# Altium PCB PCB.PcbDoc
Units mm, origin at the board's own origin, x right, y up, seen from the top; angles counter-clockwise.
Board outline 39.7 x 37.08 mm, 2 copper layers (Top Layer, Bottom Layer); 5 components, 4 nets, 14 pads, 112 vias.
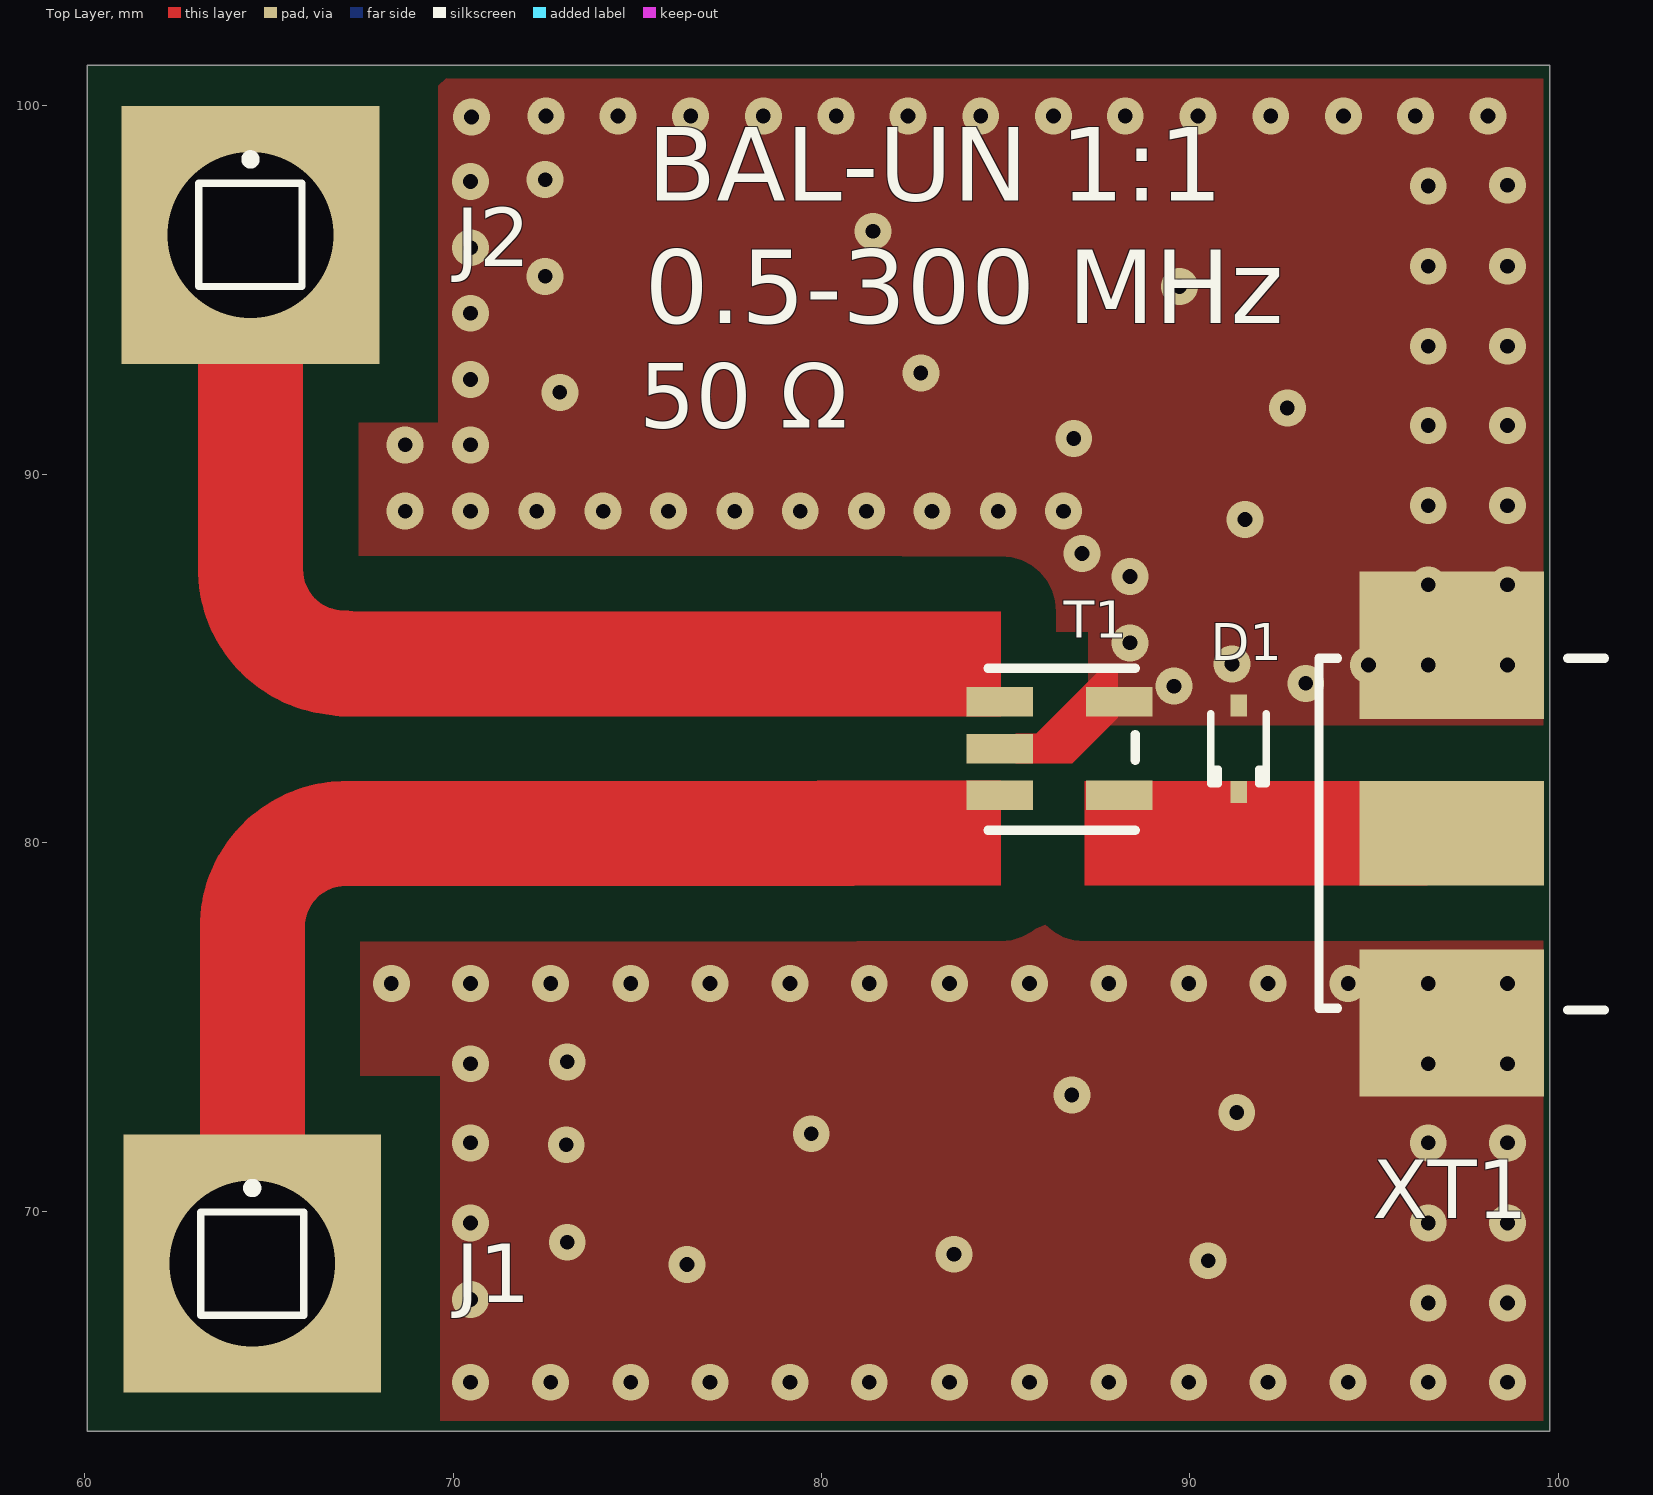
[diagram p0: Top Layer view]
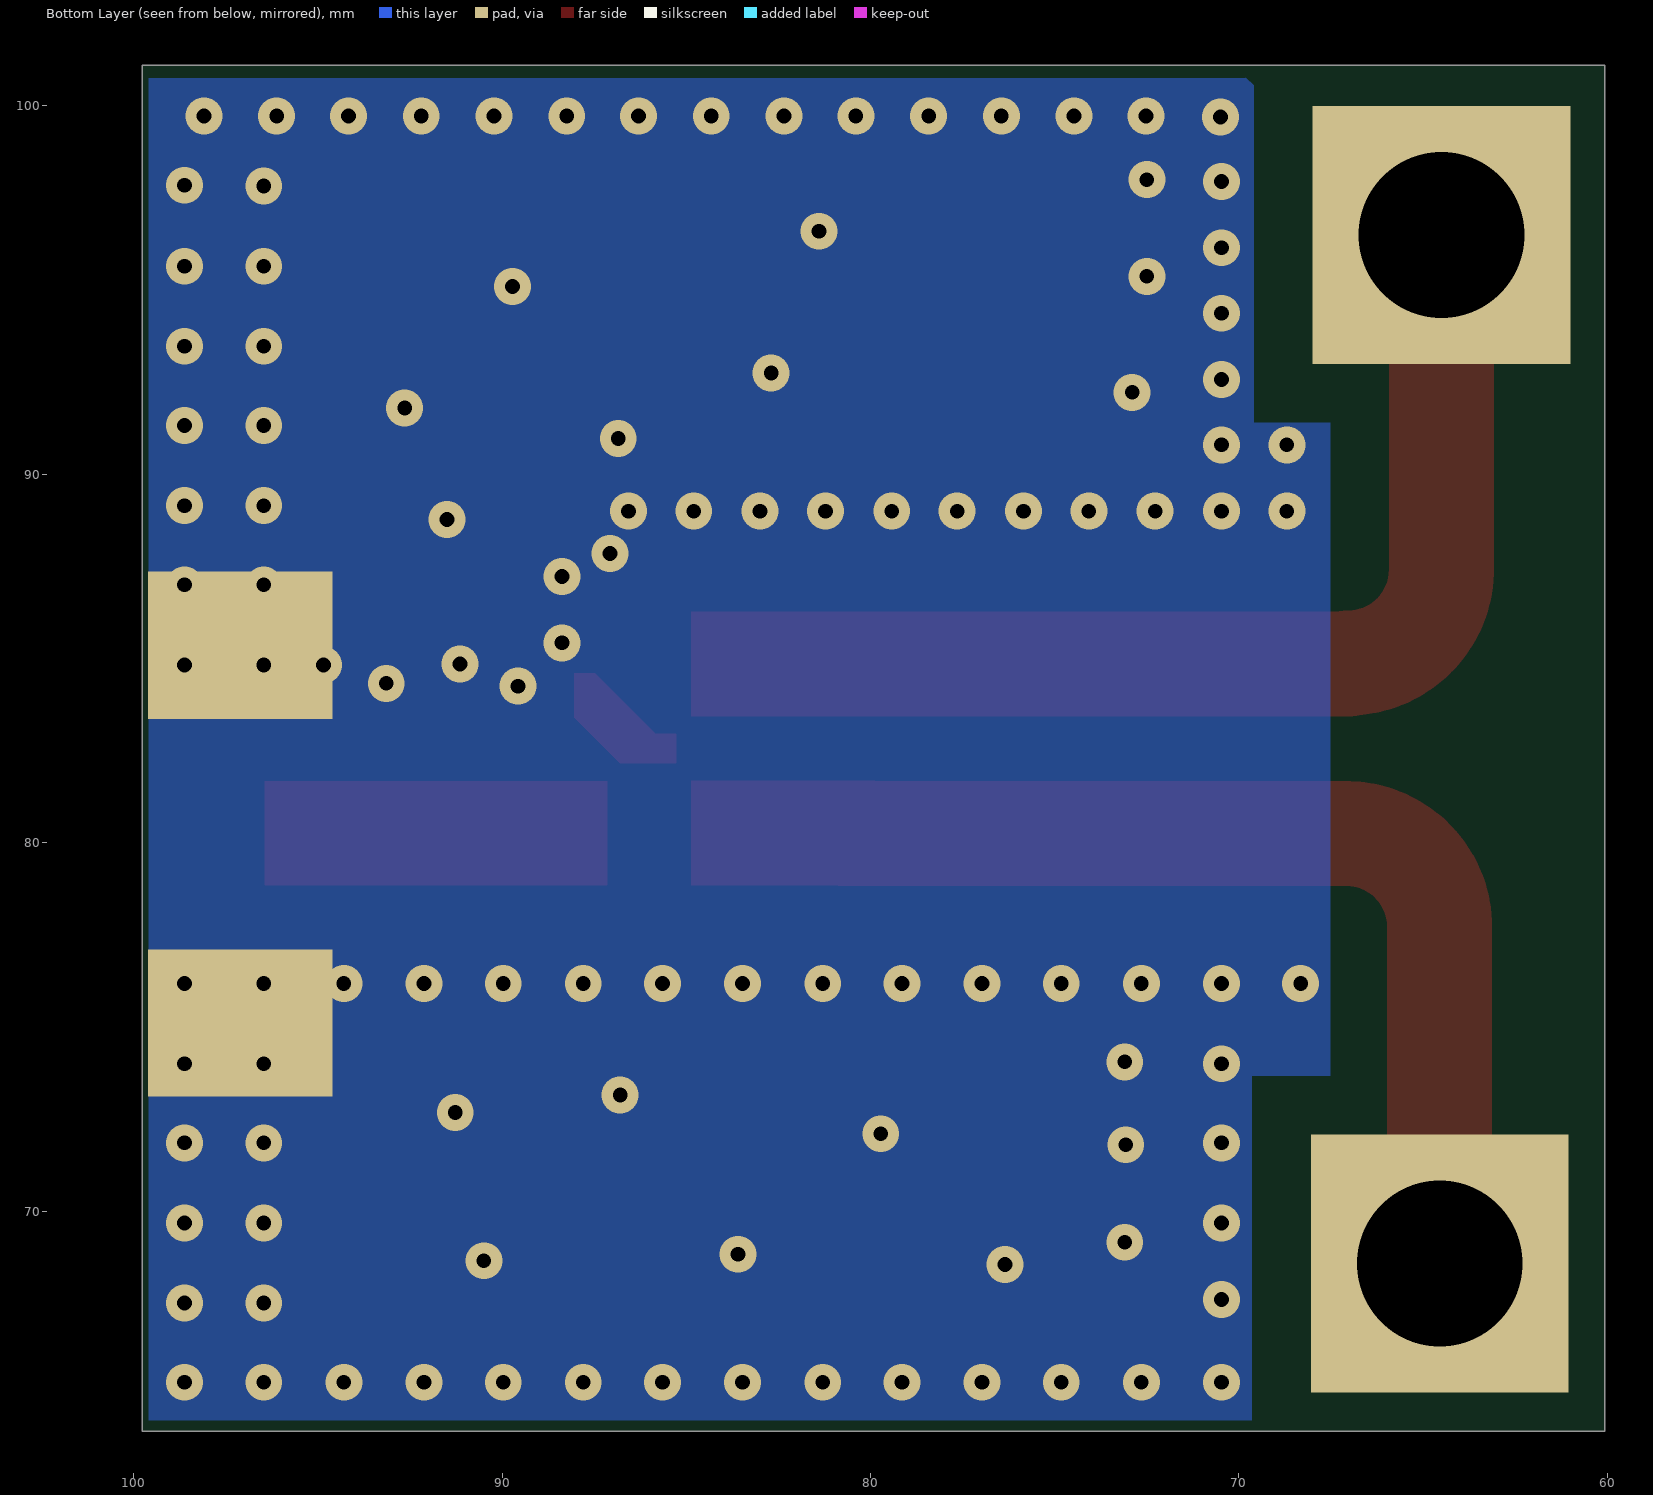
[diagram p1: Bottom Layer view, seen from below]
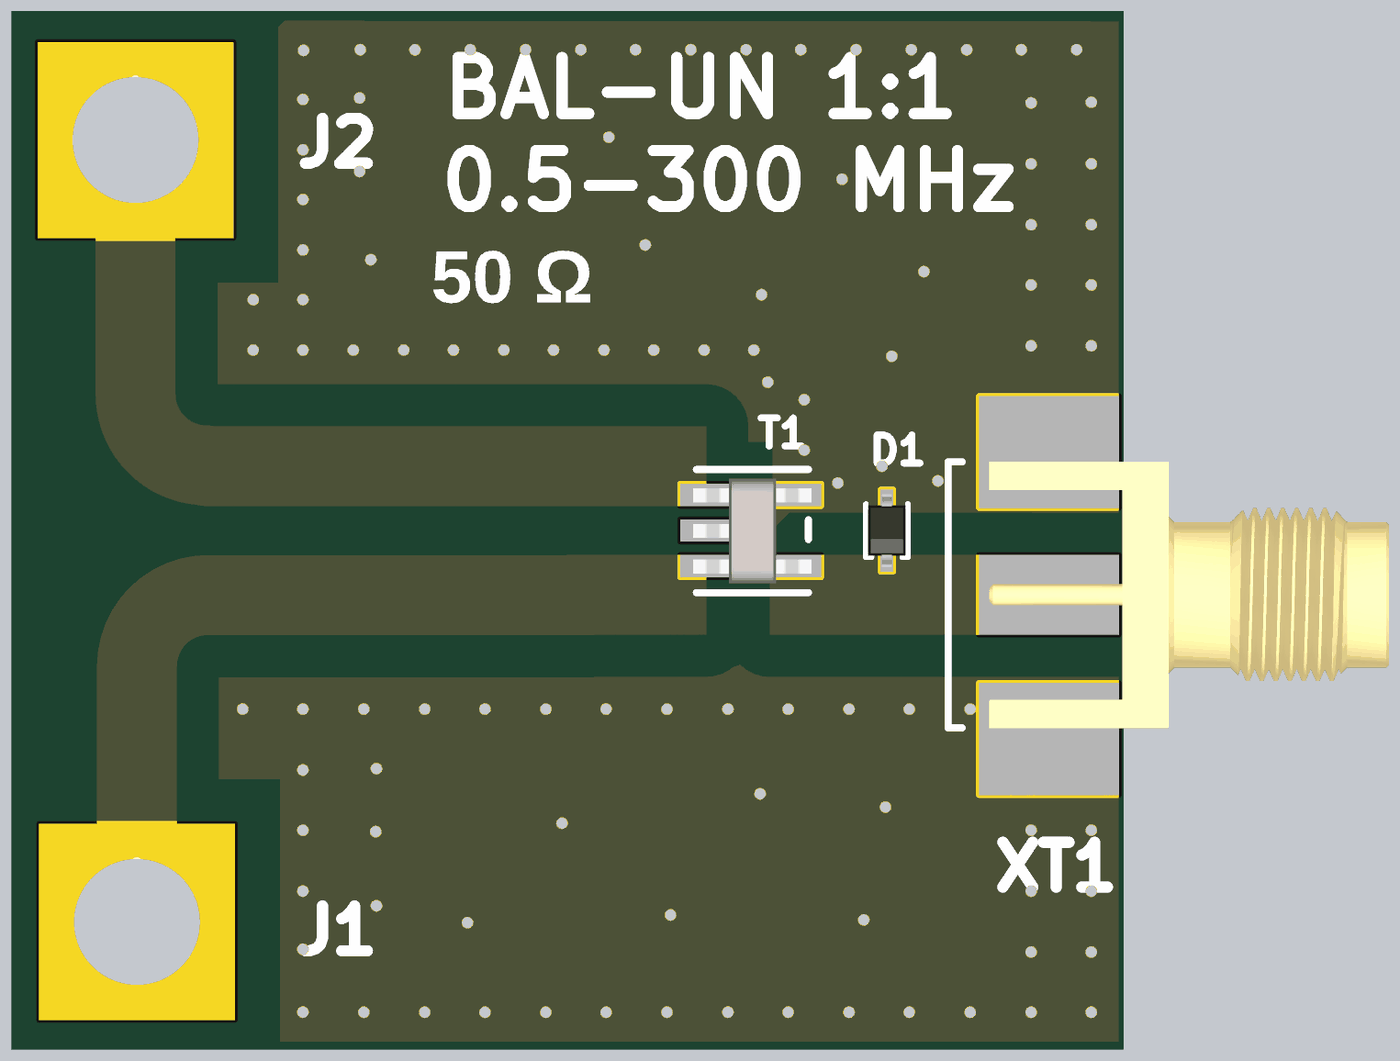
[diagram p2: 3D render of the assembled board from above, using the file's embedded part models]

## Layer stack, top to bottom
Top Solder: solder mask 0.0102, Solder Resist, Dk 3.5
Top Layer: signal copper 0.0356
Dielectric 1: dielectric 0.32, FR-4, Dk 4.8
Bottom Layer: signal copper 0.0356
Bottom Solder: solder mask 0.0102, Solder Resist, Dk 3.5

## Board outline
60.075,101.1 60.075,64.025 99.775,64.025 99.775,101.1

## Design rules (kind name [scope] priority, off if disabled: settings)
Clearance [All] p1: gap=0.4 ignorepadtopadclearanceinfootprint=TRUE except(1.5: Arc-Fill Arc-Poly Arc-Region Track-Fill Track-Poly Track-Region SMDPad-Fill SMDPad-Poly SMDPad-Region Fill-Fill Fill-Poly Fill-Region Poly-Poly Poly-Region Region-Region; 1.6: THPad-Fill THPad-Poly THPad-Region)
PlaneConnect [All] p1: planeconnectstyle=Direct reliefexpansion=0.508 reliefentries=4 reliefconductorwidth=0.254 reliefairgap=0.254
PolygonConnect [All] p1: connectstyle=Direct reliefconductorwidth=0.254 reliefentries=4 polygonreliefangle="90 Angle" airgapwidth=0.254
RoomDefinition balun [InComponentClass('balun')] p1 off: confinementstyle=ConfineIn formatcopy=TRUE lockcomponents=FALSE outline 55.295,41.379 133.4,41.379 133.4,60.175 55.295,60.175
RoutingVias [All] p1: holewidth=0.4 width=1 viastyle="Through Hole" minholewidth=0.4 minwidth=1 maxholewidth=0.4 maxwidth=1
SolderMaskExpansion [All] p1: expansion=0.102
Width [All] p1: maxlimit=3 minlimit=0.4 preferedwidth=0.8 impedancedriven=TRUE minimp=50.000000 maximp=50.000000 favimp=50.000000
29 further rules are at their usual default settings.

## Components (designator, comment, footprint, x,y, rotation, side; value= is the part's Value field where it differs from the comment)
D1 "NC" SOD-323 91.325,82.55 r270 top
J1 "A" PIN1 64.55,68.575 r0 top
J2 "B" PIN1 64.5,96.5 r0 top
T1 "TC4-1T" AT224 86.625,82.635 r90 top
XT1 "COAX-F" SMA-16 97.011,80.256 r180 top locked

## Footprints (in the part's own frame and the unit in brackets; to place one, negate y for a bottom-side part, rotate by r counter-clockwise, add the part's x,y. Pads: shape width x height; smd on the part's side, far side on the other; paste and mask are expansions set on the pad)
AT224 [mm] "Case style: AT224"
  rect 0.8x1.8 smd: 1(-1.35,1.78) 2(-0.08,1.78) 3(1.19,1.78) 4(1.19,-1.46) 6(-1.35,-1.46)
  silkscreen extent -2.3,-1.9 2.1,2.1, body extent -1.97,-2.01 1.77,2.22, height 3.55
PIN1 [mm] "Connector; Plug"
  rect 7x7 hole 4.5: 1(0,0)
  silkscreen extent -1.4,-1.4 1.4,2.17
SMA-16 [mm] "Edge female socket SMA"
  rect 5x2.85 smd: 1(-0.1,0)
  rect 5x4 smd: 2(-0.1,5.15) 2(-0.1,-5.1)
  rect 5x4 smd far side: 2(-0.1,5.15) 2(-0.1,-5.1)
  silkscreen extent -4.25,-4.75 3.5,4.8, body extent -12.25,-4.76 2.03,4.76, height 4.32
SOD-323 [mm]
  rect 0.59x0.45 smd: 1(-1.175,0) 2(1.175,0)
  silkscreen extent -0.95,-0.75 0.95,0.75, body extent -1.3,-0.68 1.3,0.67, height 1.1

## Part data
D1: library part TVS_BIDIR, "TVS Diodes"
J1 J2: library part Socket, "Socket", LatestRevisionDate=17-Jul-2002, LatestRevisionNote="Re-released for DXP Platform.", Publisher="Altium Limited"
T1: "RF TRANSFORMERS WIDEBAND"
XT1: "RF Coaxial PCB Connector, MCX; Thru-Hole, Right-Angle Mount Socket, Blunt Post Terminal, 50 Ohm Impedance", PackageDocument=04-Jul-1999, ComponentLink1Description="Manufacturer Link", ComponentLink1URL=http://www.amphenolrf.com/, DatasheetDocument=30-May-2003, DrillSize="Corresponds to nominal value.", LatestRevisionDate=15-Jul-2004, LatestRevisionNote="Component Replaced.", PackageReference=919-119J-51AX, PCB_Layout="Complies with manufacturer's recommendation.", Published=15-Jul-2004, Publisher="Altium Limited"

## Via types
v1: diameter 1, hole 0.4, Top Layer to Bottom Layer, tented both sides, 112 vias

## Nets (pads, with @x,y where several pads share a name; then routed paths per layer and width w, separated by ;. In a path a pad name is that pad's centre, name@x,y a point inside that pad or via, vN(x,y) a via of type N, cw(c..) or ccw(c..) an arc to the next point about the centre after c; other vN are vias at no path point)
GND: D1.1 T1.2 T1.4 XT1.2
  other v1: 70.475,65.35 72.65,65.35 74.825,65.35 76.975,65.35 79.15,65.35 81.3,65.35 83.475,65.35 85.65,65.35 87.8,65.35 89.975,65.35 92.125,65.35 94.3,65.35 96.475,65.35 98.625,65.35 96.475,67.5 98.625,67.5 70.475,67.6 76.35,68.55 90.5,68.65 83.6,68.825 73.1,69.15 70.475,69.675 96.475,69.675 98.625,69.675 73.075,71.8 70.475,71.85 96.475,71.85 98.625,71.85 79.725,72.1 91.275,72.675 86.8,73.15 70.475,74 96.475,74 98.625,74 73.1,74.05 68.325,76.175 70.475,76.175 72.65,76.175 74.825,76.175 76.975,76.175 79.15,76.175 81.3,76.175 83.475,76.175 85.65,76.175 87.8,76.175 89.975,76.175 92.125,76.175 94.3,76.175 96.475,76.175 98.625,76.175 89.575,84.25 93.15,84.325 94.85,84.825 96.475,84.825 98.625,84.825 91.15,84.85 88.375,85.425 96.475,87 98.625,87 88.375,87.225 87.075,87.85 91.5,88.775 68.7,89 70.475,89 72.275,89 74.075,89 75.85,89 77.65,89 79.425,89 81.225,89 83,89 84.8,89 86.575,89 96.475,89.15 98.625,89.15 68.7,90.8 70.475,90.8 86.85,90.975 96.475,91.325 98.625,91.325 92.65,91.8 72.9,92.225 70.475,92.575 82.7,92.75 96.475,93.475 98.625,93.475 70.475,94.375 89.725,95.1 72.5,95.375 96.475,95.65 98.625,95.65 70.475,96.15 81.4,96.6 96.475,97.825 98.625,97.85 70.475,97.95 72.5,98 70.5,99.7 72.525,99.725 74.475,99.725 76.45,99.725 78.425,99.725 80.4,99.725 82.35,99.725 84.325,99.725 86.3,99.725 88.25,99.725 90.225,99.725 92.2,99.725 94.175,99.725 96.125,99.725 98.1,99.725
NetJ1_1: J1.1 T1.1 | length 26.9
  Top Layer w0.8: 80.769,80.291 ccw(c80.769,80.343) 80.821,80.343
  Top Layer w2.85: J1.1 64.55,77.71 ; 64.55,77.714 64.55,77.751 ; 64.55,77.745 cw(c67.09,77.71) 67.09,80.25 ; 67.09,80.246 80.769,80.246
NetJ2_1: J2.1 T1.3 | length 28.8
  Top Layer w2.85: J2.1 64.5,87.419 ccw(c67.04,87.419) 67.04,84.879 ; 67.04,84.853 82.764,84.853
OUT: D1.2 T1.6 XT1.1

## Polygon pours and split planes (outlines as drawn)
GND on Bottom Layer "Bottom-GND" (solid, remove dead copper, pour order 2): 67.525,100.77 67.525,64.325 99.6,64.325 99.6,100.75
GND on Top Layer "Top-GND" (solid, remove dead copper, pour order 0): 60.35,100.762 60.35,64.3 99.6,64.3 99.6,100.737

## Other copper
Top Layer:
  rectangle net NetJ2_1: 79.929,83.428 84.875,86.274
  region net NetJ1_1: 84.875,81.684 79.874,81.684 79.874,78.834 84.875,78.834
  rectangle net OUT: 87.146,78.831 96.45,81.681
  region net GND: 85.275,82.955 85.83,82.955 87.472,84.597 88.05,84.597 88.05,83.398 86.806,82.154 85.275,82.154

## Silkscreen, mask and mechanical layers (free items; w line width, h text height)
Top Overlay:
  text "BAL-UN 1:1" at 75.275,97.425 h2
  text "0.5-300 MHz" at 75.2,94.1 h2
  text "50 Ω" at 75.05,90.7 h3
Mechanical 1:
  lines w0.254: 59.95,63.875 59.95,101.225 99.879,101.225 99.879,63.875 59.95,63.875